# EAGLE board Module-WiFi-M0-v0.4-Board-1 (EAGLE 7.5.0)
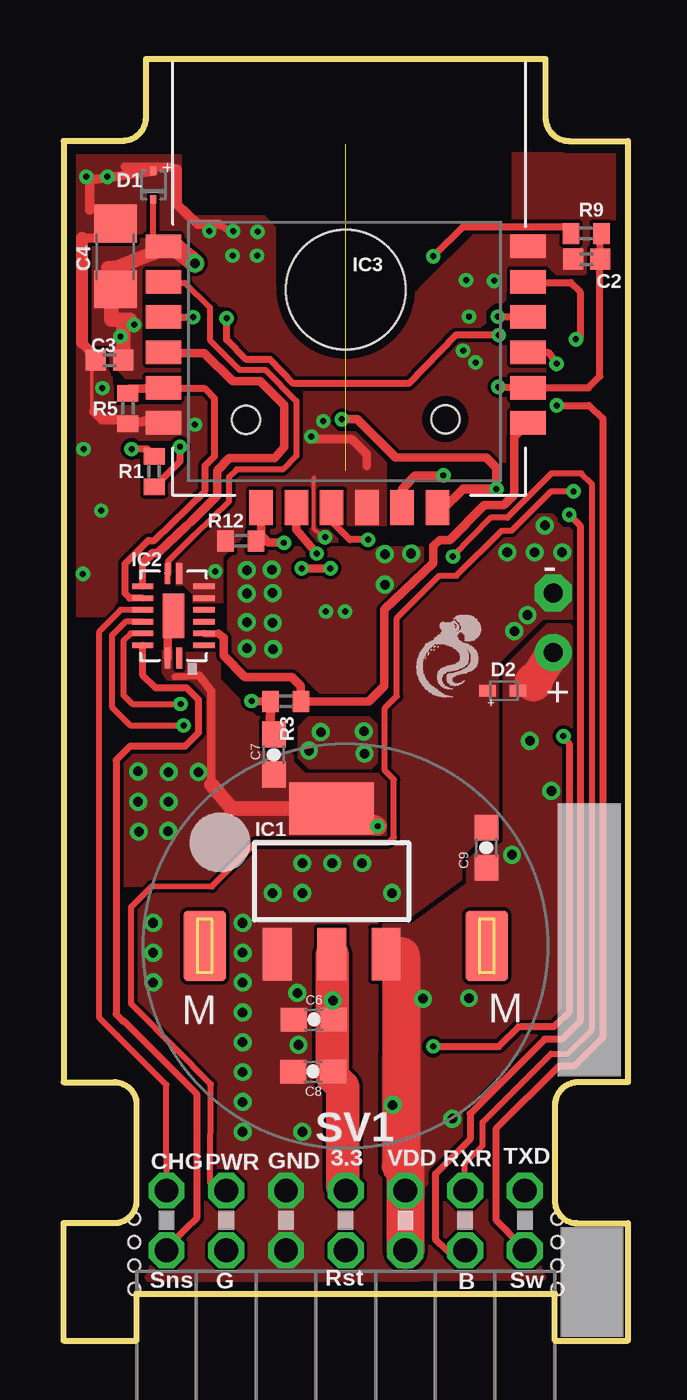
[diagram p0: board, top side]
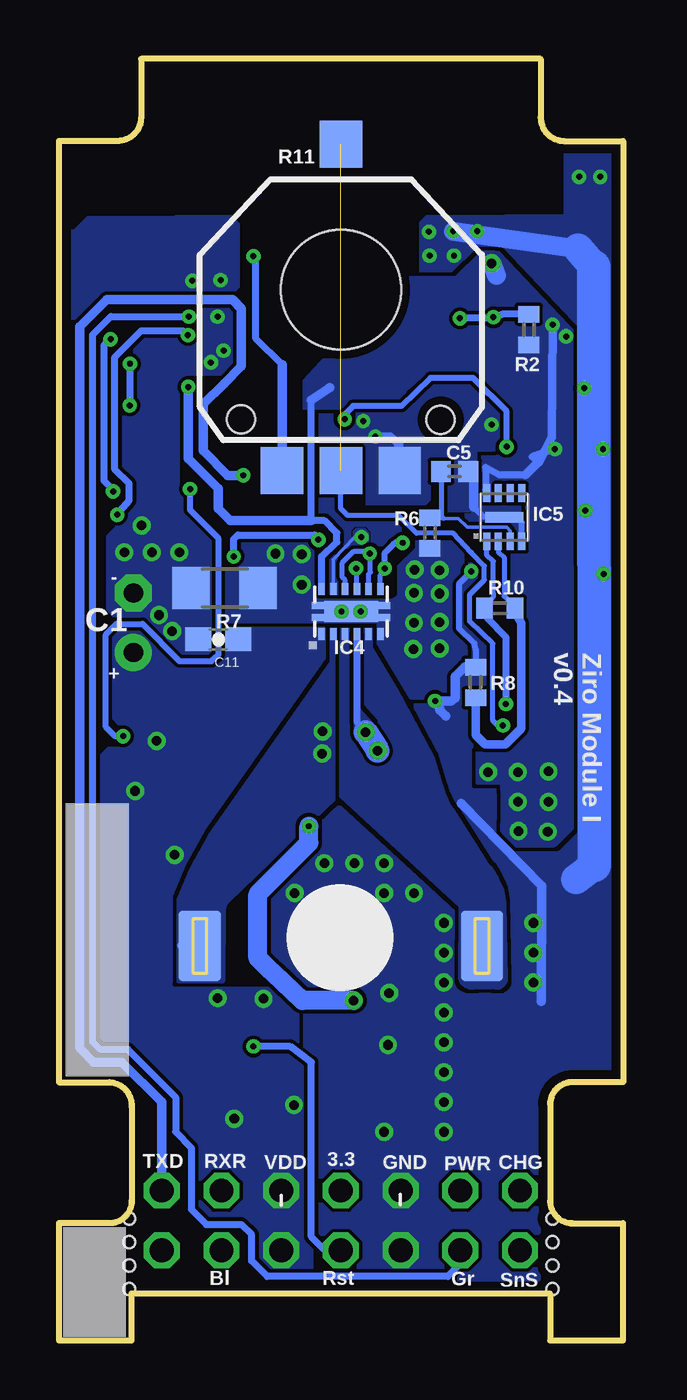
[diagram p1: board, bottom side, seen from below]

Size 24 x 54.55 mm. Coordinates in mm from the lower left corner, seen from the top.
Outline: 3.1,2 20.9,2 20.9,0 24,0 24,5 21.85,5 arc-90 20.9,5.96 20.9,9.97 arc-90 21.85,11 24,11 24,51.05 21.5,51.05 arc-90 20.5,52.05 20.5,54.55 3.5,54.55 3.5,52.05 arc-90 2.5,51.05 0,51.05 0,11 2.15,11 arc-90 3.1,10.07 3.1,5.96 arc-90 2.15,5 0,5 0,0 3.1,0 3.1,2
Copper layers (1*16): Top 0.0356mm / dielectric 1.5011mm / Bottom 0.0356mm
Design rules "oshpark-2layer-via-buried": minimum track width 6mil, minimum drill 10mil, track to track 6mil, track to pad 6mil, pad to pad 6mil, via to via 6mil, smd to smd 6mil, copper to edge 15mil, drill to drill 6mil, minimum pad ring 7mil, minimum via ring 7mil, stop-mask expansion 2.5mil, vias tented up to drill 16mil, thermal gap 10mil
Holes 0.5 mm at 3,5.2 3,2.2 3,4.2 3,3.2 21,5.2 21,4.2 21,3.2 21,2.2
tRestrict: area 5.5,31.2 to 6.8,31.3; 67 lines
bRestrict: area 22,34.3 to 22.1,35.5; area 13,32.3 to 13.1,33.6; area 8.8,35.4 to 11.7,35.5; area 6.7,33 to 6.7,33.5; 54 lines

## Footprints (pad centres in the part's own frame; a part is rotated, then mirrored left to right if it is on the bottom)
CAP-SLEEP = drill 0.813 pad 1.575: + 1.27,0 | drill 0.813 pad 1.575 octagon: - -1.27,0
0402-CAP = smd 0.85 x 0.9: 1 -0.58,0; 2 0.58,0
1206 = smd 1.6 x 1.8: 1 -1.4,0; 2 1.4,0
0603-CAP = smd 1.1 x 1: 1 -0.85,0; 2 0.85,0
SOD-923 = smd 0.36 x 0.25: A -0.6,0; C 0.6,0
SOD523 = smd 0.7 x 0.5: A 0.7,0; C -0.6,0
SOT223 = smd 1.219 x 2.235: 1 -2.311,-3.099; 2 0,-3.099; 3 2.311,-3.099 | smd 3.6 x 2.2: 4 0,3.099
DHVQFN16 = smd 0.24 x 0.9: 1 -0.25,1.8; 8 -0.25,-1.8; 9 0.25,-1.8; 16 0.25,1.8 | smd 0.9 x 0.24: 2 -1.3,1.25; 3 -1.3,0.75; 4 -1.3,0.25; 5 -1.3,-0.25; 6 -1.3,-0.75; 7 -1.3,-1.25; 10 1.3,-1.25; 11 1.3,-0.75; 12 1.3,-0.25; 13 1.3,0.25; 14 1.3,0.75; 15 1.3,1.25 | smd 0.9 x 1.9: EPAD 0,0
WT8266 = smd 1.5 x 1: 1 -7.9,1.35; 2 -7.9,-0.15; 3 -7.9,-1.65; 4 -7.9,-3.15; 5 -7.9,-4.65; 6 -7.9,-6.15; 13 7.6,-6.15; 14 7.6,-4.65; 15 7.6,-3.15; 16 7.6,-1.65; 17 7.6,-0.15; 18 7.6,1.35 | smd 1 x 1.5: 7 -3.75,-9.75; 8 -2.25,-9.75; 9 -0.75,-9.75; 10 0.75,-9.75; 11 2.25,-9.75; 12 3.75,-9.75
DSS12_P9X2 = smd 0.5 x 0.28: 1 -0.959,1.25; 2 -0.959,0.75; 3 -0.959,0.25; 4 -0.959,-0.25; 5 -0.959,-0.75; 6 -0.959,-1.25; 7 0.959,-1.25; 8 0.959,-0.75; 9 0.959,-0.25; 10 0.959,0.25; 11 0.959,0.75; 12 0.959,1.25 | smd 0.9 x 2.3: 13 0,0 | smd 0.305 x 0.61: 13@1 -0.25,1.36; 13@2 0.25,1.36; 13@3 -0.25,-1.36; 13@4 0.25,-1.37 | drill 0.254 pad 0.508: G1 0,0.406; G2 0,-0.406
DFN-8 = smd 0.3 x 0.75: 1 -0.75,-1.025; 2 -0.25,-1.025; 3 0.25,-1.025; 4 0.75,-1.025; 5 0.75,1.025; 6 0.25,1.025; 7 -0.25,1.025; 8 -0.75,1.025 | smd 1.6 x 0.45: PAD 0,0
MOTOR-NO_HOLE = smd 1.8 x 3: M1@1 6,0; M2@1 -6,0 | smd 1.8 x 3 bottom: M1@2 6,0; M2@2 -6,0 | smd 0.305 x 0.152: M1@3 6,1.3; M2@3 -6,1.3
R0402 = smd 0.7 x 0.9: 1 -0.65,0; 2 0.65,0
R1206 = smd 1.6 x 1.803: 1 -1.422,0; 2 1.422,0
ANGLE_SENSOR_MURATA = smd 1.8 x 2: 1 -2.5,-7.7; 2@1 0,-7.7; 2@2 0,6.2; 3 2.5,-7.7 | hole 5.1: 0,0 | hole 1.2: -4.24,-5.51; 4.24,-5.53
FE07-2W = drill 1.016 octagon: 1 -7.62,1.27; 2 -7.62,-1.27; 3 -5.08,1.27; 4 -5.08,-1.27; 5 -2.54,1.27; 6 -2.54,-1.27; 7 0,1.27; 8 0,-1.27; 9 2.54,1.27; 10 2.54,-1.27; 11 5.08,1.27; 12 5.08,-1.27; 13 7.62,1.27; 14 7.62,-1.27

## Placement (x,y rotation side)
C1  47uF,25V  [CAP-SLEEP]  20.82,30.55 270 bottom
C2  0.1uF  [0402-CAP]  22.25,46.02 180 top
C3  0.1uF  [0402-CAP]  1.96,41.72 180 top
C4  100u  [1206]  2.2,46.13 90 top
C5  0.1uF  [0402-CAP]  7.16,36.99 0 bottom
C6  1u  [0603-CAP]  10.64,13.67 180 top
C7  1u  [0603-CAP]  8.95,24.94 90 top
C8  1u  [0603-CAP]  10.62,11.46 180 top
C9  1u  [0603-CAP]  17.98,20.98 90 top
C11  1u  [0603-CAP]  17.21,29.84 180 bottom
D1  ESD9X5.0ST5G  [SOD-923]  3.82,49.16 270 top
D2  PMEG3005EB  [SOD523]  18.74,27.66 180 top
IC1  LM1117_3.3VSOT223  [SOT223]  11.4,19.55 0 top
IC2  74HC4051_DHVQFN16  [DHVQFN16]  4.67,30.85 180 top
IC3  WT8266  [WT8266]  12.15,45.21 0 top
IC4  DRV8835DSSR  [DSS12_P9X2]  11.57,31.03 90 bottom
IC5  LM358-DFN  [DFN-8]  5.05,35.04 0 bottom
M1  Round Motor  [MOTOR-NO_HOLE]  12,16.8 0 top
R1  30k  [R0402]  3.85,36.99 90 top
R2  3k  [R0402]  4.01,43.02 270 bottom
R3  30k  [R0402]  9.46,27.21 180 top
R5  3k  [R0402]  2.73,39.67 90 top
R6  30k  [R0402]  8.21,34.37 270 bottom
R7  0.02E, 1W  [R1206]  16.95,32.03 180 bottom
R8  3k  [R0402]  6.27,28.01 270 bottom
R9  30k  [R0402]  22.23,47.11 180 top
R10  30k  [R0402]  5.24,31.17 0 bottom
R11  10k  [ANGLE_SENSOR_MURATA]  12,44.72 0 bottom
R12  3k  [R0402]  7.54,34.03 0 top
SV1  [FE07-2W]  12,5.12 0 top

## Library data of the parts
C1 D1 IC2 IC3 M1 R11 = 1_ZeroUI
C2 C3 C5 = 1_ZeroUI; PROD_ID: CAP-12416
C4 C6-C9 C11 = SparkFun-Passives
D2 = diode
IC1 = 1_ZeroUI; PROD_ID: VREG-08170
IC4 = 1_ZeroUI; MANUFACTURER_PART_NUMBER: drv8835_dss_12; VENDOR: Texas Instruments
IC5 = 1_ZeroUI; VARIANT: DFN
R1-R3 R5-R10 R12 = rcl
SV1 = con-lsta; OC_FARNELL: unknown; OC_NEWARK: unknown

## Nets
3.3V: C2.1 C3.1 C4.1 C6.1 C7.1 C8.1 D1.C IC1.2 IC1.4 IC2.16 IC2.EPAD IC3.1 IC3.14 IC4.12 IC5.8 R1.2 R2.2 R9.1 SV1.7
/RST: IC3.12 R1.1 SV1.8
CHG_ON: IC2.12 SV1.1
GND: C1.- C2.2 C3.2 C4.2 C5.2 C6.2 C7.2 C8.2 C9.2 C11.2 D1.A D2.A IC1.1 IC2.6 IC2.7 IC2.8 IC3.6 IC3.10 IC3.18 IC4.11 IC5.4 IC5.PAD R3.2 R5.1 R7.2 R8.1 R11.3 R12.1 SV1.5 SV1.6
LED-G: IC3.16 SV1.4
MOT-1: IC4.2 IC4.4 M1.M1@1 M1.M1@2 M1.M1@3
MOT-2: IC4.3 IC4.5 M1.M2@1 M1.M2@2 M1.M2@3
MOT_IN1: IC3.8 IC4.8 IC4.10
MOT_IN2: IC3.7 IC4.7 IC4.9 R12.2
MOT_IRAW: IC4.6 IC4.13 IC4.13@1 IC4.13@2 IC4.13@3 IC4.13@4 IC4.G1 IC4.G2 R6.2 R7.1
MOT_ISNS: IC2.14 IC5.1 R10.1
MOT_POS: IC2.13 R11.2@1 R11.2@2
MUX_COM: IC2.3 IC3.13 R3.1
MUX_S0: IC2.11 IC3.5 R5.2
MUX_S1: IC2.10 IC3.4
MUX_S2: IC2.9 IC3.2
N$10: C5.1 IC5.3 R6.1
N$17: R9.2 R11.1
N$18: IC5.2 R8.2 R10.2
PROGL/LED-B: IC3.3 R2.1 SV1.12
PWR_EN: IC3.17 SV1.3
RXD/LED-R: IC3.9 SV1.11
SW_INT: IC3.15 SV1.14
TXD: IC3.11 SV1.13
VBATT_SENSE: IC2.15 SV1.2
VDD: C1.+ C9.1 C11.1 D2.C IC1.3 IC4.1 SV1.9 SV1.10

## Tracks (layer width: path | path; a pad name or v marks a point on that pad's centre or on a via)
3.3V  (via drill 0.25, 0.41)
  Top 0.152: C8.1 11.47,12.44 arc-45 11.87,6.58
  Top 0.203: 3.94,46.42 3.81,46.6
  Top 0.254: 3.94,46.42 3.81,46.84 D1.C
  Top 0.305: 1.91,44.79 1.91,45.64 | 3.73,37.53 3.83,37.53 3.91,37.61 3.58,37.94 v2.9,37.94 | 4.75,28.26 5.77,28.31 | 11.43,16.42 IC1.2 | v18.49,40.58 19.41,40.58 19.45,40.51 IC3.14 22.32,40.56 22.81,41.05 22.81,45.88 22.8,45.94 C2.1 22.8,47.17 22.71,47.21 R9.1
  Top 0.356: C4.1 1.91,44.79 | 3.8,46.28 3.81,46.6 | R1.2 3.73,37.53 | IC2.16 4.42,30.6 IC2.EPAD | 5.77,28.31 6.27,27.65 6.27,23.67 | C6.1 11.47,13.26 11.43,13.31
  Top 0.406: C4.1 2.03,45.17 | 2.82,43.45 v3,43.23
  Top 0.61: 1.91,45.64 2.32,45.69 3.8,46.28 IC3.1 | 2.03,45.17 2.03,43.45 2.82,43.45 | v3,43.23 2.54,43.45 C3.1 | 6.27,23.67 7.16,22.65 IC1.4
  Top 0.813: IC3.1 4.73,46.56 v5.59,45.85 | IC1.2 11.46,15.72 v11.46,14.48 | v13.36,21.89 IC1.4
  Top 1.422: SV1.7 11.87,6.58 11.87,10.81 11.43,11.25 11.43,13.31 11.43,16.42
  Bottom 0.305: IC4.12 12.82,33.37 12.17,33.98 12.17,34.37 12.69,34.89 13.26,34.89 13.26,40.02 | 2.97,43.23 v3,43.23 | v2.9,37.94 3.86,37.61 3.58,37.33 3.58,37.36 | 4.15,36.84 5.27,36.84 5.84,37.15 5.84,36.21 IC5.8
  Bottom 0.356: v3,43.23 3,43.2 3.02,38.42 3.58,37.36 3.63,37.36 4.15,36.84
  Bottom 0.406: 13.26,34.89 16.7,34.89 17.22,35.42 17.22,36.27 18.49,37.53 v18.49,40.58 | 13.26,40.02 12.47,40.56
  Bottom 0.813: v5.59,45.85 5.41,45.36 5.38,45.34 | v11.46,14.48 13.64,14.48 14.85,15.63 15.08,15.83 15.53,16.29 15.53,19.01 13.36,21.18 v13.36,21.89
  other vias: 3.2,21.66 4.47,24.2 4.47,22.93 4.45,21.69 5.74,24.2 2.42,42.73 3.17,22.93 3.17,24.23
  pour Top (no thermals): 13.79,21.48 13.82,21.66 13.82,24.1 10.26,24.1 9.73,24.63 9.73,26.48 8.18,26.54 6.63,28.14 6.63,28.77 6.63,29.31 6.68,29.36 0.1,29.31 0.13,24.33 -0.05,24.58 -0.1,19.37 4.65,19.35 6.14,19.55 8.03,21.43
  pour Bottom (rank 2, no thermals): 13.56,45.21 7.06,45.21 5.98,46.3 5.34,46.3 -0.19,40.42 -0.31,24.36 2.95,21.08 4.65,21.08 5.11,21.7 arc-5 5.11,23.75 6.16,23.75 6.15,24.94 6.15,27.65 6.6,28.17 6.02,28.16 6.05,37.59 4.75,37.61 4.72,39.72 13.61,39.69
  pour Top (no thermals): 4.78,46.81 1.14,46.78 1.14,42.6 2.68,41.04 4.88,41.01 4.85,46.58
/RST  (via drill 0.25)
  Top 0.305: v15.72,12.52 18.52,12.52 19.36,13.36 20.86,13.36 21.5,14 21.5,25.41 21.3,25.6 v21.26,25.72 | 16.09,35.21 IC3.12 | v4.95,38.04 4.95,37.41 3.91,36.37 3.85,36.37 R1.1
  Top 0.356: v11.84,39.21 12.5,39.21 14.12,37.59 16.31,37.59 17.98,37.59 18.41,37.15 v18.41,36.24
  Top 0.406: 16.09,35.21 16.09,35.34 16.99,36.24 v18.41,36.24
  Bottom 0.254: 21.35,25.72 21.6,25.72 22,26.12 22,30.05 21.55,30.5 20.43,30.5 18.87,28.91 17.51,28.91 17.2,29.2 17.2,34.13 18.41,35.35 v18.41,36.24 | v4.95,38.04 4.95,39.55 6.37,40.97 8.19,40.97 9.42,39.77 11.48,39.77 11.84,39.41 v11.84,39.21
  Bottom 0.305: SV1.8 12.5,3.83 12.66,3.83 13.26,4.43 13.26,11.85 14.16,12.52 v15.72,12.52 | v21.26,25.72 21.35,25.72
CHG_ON
  Top 0.254: IC2.12 2.43,31.1 1.52,30.17 1.52,13.73 2.29,12.97 4.37,10.9 4.37,7.85 4.38,7.73 SV1.1
GND  (via drill 0.25, 0.41)
  Top 0.152: 1.28,39.53 1.19,39.62 1.19,41.8 C3.2 | v11.12,34.19 10.64,34.52 | 10.64,36.73 10.67,36.75
  Top 0.178: 10.64,34.52 10.64,36.73
  Top 0.305: v7.21,47.21 7.09,47.19 6.6,47.52
  Top 0.356: R5.1 2.53,39.19 | v10.54,38.48 10.44,38.55 10.62,38.37 12.27,38.37 12.9,37.74 12.9,37.23 | 4.84,49.85 4.57,49.96 2.6,49.96 D1.A | R3.2 v8,27.22
  Top 0.406: 1.77,46.94 0.79,46.92 | C3.2 1.21,42 0.79,42.48 | 4.04,39.22 R5.1 | 2.53,39.19 1.63,39.19 1.28,39.53 | 1.11,48.11 1.11,49.53 1.09,49.38 D1.A | 6.6,47.52 5.71,47.52 4.84,48.34 4.84,49.85 | C7.2 8.8,26.09 R3.2
  Top 0.508: 0.79,42.48 0.79,46.92
  Bottom 0.152: v11.12,34.19 11.41,34.19 12.32,33.25 IC4.11
  Bottom 0.254: v6.45,32.73 6.99,32.19 6.99,30.34 | IC5.4 4.3,34.8 4.55,35.05 | IC5.PAD 5.94,35.07 6.35,35.48 | R8.1 6.27,29.43 6.33,29.69 6.99,30.32
  Bottom 0.356: v10.54,38.48 9.89,38.47 9.53,38.18 | 4.55,35.05 4.74,35.07 IC5.PAD
  Bottom 0.406: R11.3 9.53,38.18 | 7.54,26.59 7.8,26.85 arc-45 v8,27.22 7.3,27.22 7.14,27.35 7.14,28.27 6.74,28.68 6.22,28.68 R8.1 | 6.88,22.86 3.45,19.35 3.48,14.45 | 6.35,35.48 6.35,36.88 C5.2
  Bottom 0.813: v7.21,47.21 1.91,46.48
  Bottom 1.27: 1.91,46.48 1.25,45.71 | 1.22,20.23 1.99,19.64
  Bottom 1.422: 1.25,45.71 1.22,20.23
  other vias: 7.62,17.78 11.43,20.32 7.62,13.97 7.62,12.7 7.62,15.24 7.62,16.51 17.12,45.13 18.31,45.1 16.99,42.13 8.26,47.19 8.23,46.17 7.19,46.17 5.59,38.98 12.7,20.32 20.47,34.69 21.21,33.55 0.85,37.94 0.97,49.52 0.83,32.63 6.2,47.21 7.62,10.16 7.62,11.43 10.16,20.32 18.87,33.55 17.25,43.58 1.65,40.53 20.04,33.55 19.74,30.88 1.6,35.33 11.05,39.14 17.53,41.62 19.18,30.19 7.62,8.89 3.81,17.78 3.81,16.51 3.81,15.24 9.94,14.8 10.16,8.89 10,12.59 8.89,19.05 1.87,49.52 10.16,19.05 13.97,19.05
  pour Bottom (rank 6, no thermals): 0,0 24.13,0 24.13,57.22 0,57.22
  pour Top (rank 6, no thermals): 2.26,2.54 11.15,2.54 11.25,2.56 23,2.68 23,31.64 14.05,31.18 14.02,21.46 2.41,21.46
  pour Top (rank 2, no thermals): 24.56,38.12 14.17,38.12 14.17,28.09 24.56,28.09
  pour Top (isolate 0.025, rank 2, no thermals): -5.08,57.22 30.48,57.22 30.53,33.95 15.32,33.83 7.47,33.83 6.86,33.22 6.83,33.22 6.83,30.14 -5.03,30.14
LED-G  (via drill 0.25)
  Top 0.305: v18.47,43.58 19.75,43.58 IC3.16
  Bottom 0.305: v18.47,43.58 21.78,43.58 22.55,42.81 22.55,12.72 22.23,12.4 21.06,12.4 19.02,10.37 19.02,8.89 18.36,8.2 18.36,5.59 17.73,4.95 16.23,4.95 15.8,4.52 15.8,3.4 15.14,2.74 7.44,2.74 6.92,3.26 SV1.4
MOT-1  (via drill 0.41)
  Top 0.305: M1.M1@2 18.25,17.05 18.27,17.06 18.57,17.44 18.57,17.69 18.52,17.76
  Bottom 0.305: IC4.4 11.32,26.33 v10.95,25.9
  Bottom 0.356: M1.M1@2 18.8,16.83
  Bottom 1.016: v10.95,25.9 v10.44,25.11
  other vias: 12.8,24.99 12.78,25.93
  pour Bottom (rank 3, no thermals): 12.19,30.37 12.19,23.11 16.78,18.7 arc-52 16.96,18.34 16.99,15.39 arc90 17.22,15.15 18.85,15.18 arc89 19.01,15.5 19,18.41 arc17 19,18.73 18.82,19.31 arc20 18.46,20.31 16.14,23.97 12.58,29 12.5,29.3 12.5,30.37
  pour Top (rank 4, no thermals): 10.03,24.6 10.03,26.1 10.41,26.49 13.01,26.51 13.41,26.11 13.41,24.72 12.89,24.2 10.43,24.2
  pour Bottom: 11.23,26.87 10.64,26.23 11.25,25.88 arc120 11.39,25.96 11.39,26.92 11.25,26.9 arc81
MOT-2
  Bottom 0.254: 5.68,16.77 M1.M2@2
  pour Bottom (rank 2, no thermals): 6.93,18.49 6.95,15.41 arc-89 6.25,15.03 5.43,15.01 arc-91 4.97,15.34 5.02,18.62 5.11,19.15 arc-19 5.83,20.35 7.27,22.6 arc18 7.74,23.69 7.73,23.64 8.02,24.63 arc-12 8.14,24.91 10.57,29.41 10.57,30.32 11.05,30.32 12,30.34 12,23.16
MOT_IN1  (via drill 0.25)
  Top 0.356: v10.77,33.5 9.9,34.52 IC3.8
  Bottom 0.203: IC4.10 11.82,32.36 11.94,32.48 11.94,33.11 11.45,33.6 10.82,33.6 10.74,33.4 | 10.74,33.4 v10.77,33.5 | IC4.8 10.82,32.41 10.82,32.6 10.74,32.71 10.74,33.4
MOT_IN2  (via drill 0.25)
  Top 0.356: v11.35,32.86 v10.13,32.86 | v9.37,33.95 8.71,33.95 8.4,34.27 IC3.7
  Top 0.406: R12.2 8.4,34.03 8.4,34.27
  Bottom 0.203: IC4.7 10.32,32.58 10.13,32.81 | IC4.9 11.32,32.75 v11.35,32.86
  Bottom 0.254: 10.13,32.81 v10.13,32.86 10.14,33.52 9.75,33.9 9.63,34 arc-37 v9.37,33.95
MOT_IRAW  (via drill 0.41)
  other vias: 13.67,32.18 8.86,32.81 8.92,29.43 8.89,31.82 7.8,32.79 7.8,31.79 7.8,30.58 8.89,30.55 7.8,29.46 13.67,33.47 14.78,33.5
  pour Bottom (no thermals): 17.17,33.98 6.73,34 6.81,33.12 6.65,28.54 7.45,28.54 7.49,28.33 7.49,27.34 9,27.36 10.41,29.69 10.41,30.6 17.2,30.6
  pour Top (no thermals): 15.27,33.73 7.49,33.73 7.04,33.17 7.04,29.1 9.32,26.82 13.72,26.79 13.59,31.16 15.23,32.56
MOT_ISNS  (via drill 0.25)
  Top 0.254: IC2.14 2.85,30.1 2.54,29.79 2.54,27.48 2.92,27.1 v4.98,27.1
  Bottom 0.203: R10.1 5.51,31.67 5.51,32 5.51,33.16 5.79,33.4 IC5.1
  Bottom 0.305: R10.1 5.79,31.08 5.79,30.78 4.98,29.94 v4.98,27.1
MOT_POS  (via drill 0.25)  (1 unrouted)
  Top 0.254: IC2.13 2.64,30.6 2.06,30.02 2.06,26.97 2.85,26.18 v5.11,26.18
  Bottom 0.203: v5.11,26.18 5.3,26.16 5.54,26.39 5.54,29.66 6.53,30.61 6.53,31.75 5.89,32.37 5.89,32.97 6.44,33.52 6.45,33.55 7.21,34.36 8.79,34.36 9.55,35.12 11.72,35.12 12.01,35.42 12.01,37.01
  Bottom 0.305: R11.2@1
  Bottom 0.356: 12.01,37.01 R11.2@1
MUX_COM
  Top 0.305: IC2.3 6.57,30.1
  Top 0.356: 6.57,30.1 6.81,29.91 6.81,29.15 7.72,28.24 9.71,28.24 10.08,27.86 10.08,27.23 R3.1 | IC3.13 20.24,38.79 19.96,39.29 19.18,38.48 19.18,36 18.73,35.55 17.89,35.55 16.42,34.08 16,34.08 15.72,33.81 15.72,33.09 13.64,31.11 13.64,27.86 12.98,27.21 R3.1 | R3.1 10.01,27.31
MUX_S0
  Top 0.305: IC2.11 2.81,31.6 2.62,31.8 2.62,33.06 3.61,34.05 3.85,34.05 arc45 3.87,34.06 6.02,36.16 6.02,37.23 6.43,37.64 6.43,40.1 6.02,40.51 4.25,40.51
  Top 0.356: R5.2 2.8,40.5 2.8,40.52 4.24,40.52 IC3.5 4.25,40.51
MUX_S1
  Top 0.305: IC2.10 3.37,33.11
  Top 0.356: 3.37,33.11 3.79,33.52 4.01,33.52 5.24,34.69 5.38,34.82 6.53,35.97 6.53,36.27 6.53,37.03 7.06,37.56 8.99,37.56 9.39,38.03 9.39,39.82 8.37,40.84 7.19,40.84 5.99,42.03 4.28,42.03 IC3.4
MUX_S2
  Top 0.254: IC3.2 5.16,45.01 6.22,43.97 6.22,42.58 7.48,41.32 8.58,41.32 9.91,39.99 9.91,37.65 9.34,37.08 7.36,37.08 7.04,36.75 7.04,35.71 5.56,34.28 4.45,33.17 4.45,32.67
  Top 0.305: 4.45,32.67 IC2.9
N$10
  Bottom 0.152: IC5.3 4.8,34.45 4.94,34.61 6.62,34.61 7.01,34.99 7.63,34.99
  Bottom 0.203: R6.1 7.63,34.99 7.74,35.07 C5.1
N$17  (via drill 0.25)
  Top 0.305: v15.72,46.15 16.99,47.42 21.3,47.42 R9.2
  Bottom 0.305: 15.64,46.11 15.64,42.67 14.5,41.53
  Bottom 0.406: 14.5,41.53 R11.1 | v15.72,46.15 15.64,46.11
N$18
  Bottom 0.203: IC5.2 5.3,33.54 5.05,33.34 5.05,31.69 R10.2
  Bottom 0.356: R8.2 6.27,25.78 5.86,25.37 5,25.37 4.32,26.05 4.32,30.55 4.65,31.08 4.6,31.29 R10.2
PROGL/LED-B  (via drill 0.25)
  Top 0.203: v6.93,43.5 6.96,43.53
  Top 0.254: 4.15,43.73 IC3.3
  Top 0.305: SV1.12 16.32,3.82 15.82,4.3 15.82,7.11 17.3,8.58 17.3,9.65 20.47,12.82 21.2,12.82 21.97,13.59 21.97,34.69 v21.51,35.15 | v18.51,42.79 16.69,42.79 14.68,40.73 9.78,40.73 8.79,41.75 7.78,41.75 6.93,42.59 v6.93,43.5 | IC3.3 v5.51,43.55
  Bottom 0.305: v21.51,35.15 21.01,35.76 21.01,36.47 21.61,37.06 21.61,41.86 20.5,42.98 18.72,42.98 v18.51,42.79 | v5.51,43.55 5.59,43.5 | 5.59,43.5 v6.93,43.5 | R2.1 5.14,43.67 5.38,43.54 5.59,43.5
PWR_EN  (via drill 0.25)
  Top 0.203: 8,21.02 8.03,21.06
  Top 0.254: SV1.3 6.89,6.19 6.25,6.71 6.27,10.92 3.11,14.1 2.87,14.34 2.87,18.45 3.77,19.35 6.31,19.32 8,21.02 | v21.69,36.14 20.73,36.14 19.05,34.46 18.62,34.46 16.71,32.56 15.98,32.56 14.17,30.75 14.17,27.43 13.66,26.92 13.66,24.26 14.05,23.88 14.05,21.43 13.83,21.21 8.18,21.21 8.03,21.06
  Top 0.305: v21.79,42.62 arc99 21.97,42.69 21.97,44.64 21.58,45.03 19.92,45.03 19.75,45
  Top 0.356: 19.75,45 IC3.17
  Bottom 0.305: v21.69,36.14 21.65,36.16 22.07,36.59 22.07,42.34 21.9,42.59 v21.79,42.62
RXD/LED-R  (via drill 0.25)
  Top 0.254: SV1.11 17.07,7.54 17.83,8.3 17.83,9.3 20.74,12.21 21.46,12.21 22.48,13.24 22.48,36.44 22.02,36.9 20.75,36.9 19.71,35.85 18.88,35.02 18.16,35.02 v16.56,33.37
  Top 0.305: v12.95,34.08 12.18,34.08 11.4,34.86 11.4,35.27 IC3.9
  Bottom 0.305: v16.56,33.37 16.56,34.11 16.38,34.29 13.12,34.29 12.95,33.95 v12.95,34.08 12.95,34
SW_INT  (via drill 0.25)
  Top 0.305: IC3.15 20.62,42.06 v20.97,41.57 | v20.98,39.8 22.36,39.8 22.94,39.24 22.94,12.91 21.71,11.68 21.06,11.68 18.39,9.01 18.39,5.16 18.82,4.73 SV1.14
  Bottom 0.305: v20.97,41.57 20.97,39.98 v20.98,39.8
TXD  (via drill 0.25)
  Top 0.356: IC3.11 14.4,36.24 14.96,36.82 v16.15,36.82
  Top 0.406: IC3.11 14.4,34.92
  Bottom 0.305: 17.86,38.42 17.86,38.45
  Bottom 0.406: SV1.13 19.62,10.16 21.32,11.85 22.51,11.85 23.11,12.45 23.11,43.15 21.97,44.29 16.59,44.29 16.23,43.93 16.23,41.47 16.97,40.73 17.85,39.85 17.86,39.84 17.86,38.45 | v16.15,36.82 16.81,36.82 17.86,37.87 17.86,38.42
VBATT_SENSE
  Top 0.305: IC2.15 3.38,28.32 3.91,27.78 5.23,27.78 5.74,27.27 5.74,25.88 5.16,25.29 2.82,25.29 2.23,24.71 2.23,13.89 2.52,13.61 2.56,13.61 5.66,10.51 5.66,5.21 5.18,4.75 4.38,3.97 SV1.2
VDD  (via drill 0.41)
  Top 0.229: D2.C 19.8,27.77 19.99,28.02
  Top 0.406: 20.3,28.78 C1.+ | 14.36,16.36 IC1.3
  Top 1.422: 20.02,28.04 20.8,29.23
  Top 1.626: SV1.10 SV1.9 14.53,7.39 14.36,7.44 14.36,16.36 | 19.99,28.02 20.02,28.04
  other vias: 19.84,25.53 20.75,23.39 19.08,20.68 17.25,14.58 16.54,9.45 15.29,14.55 14,10.03
  pour Bottom (rank 2, no thermals): 13.23,2.54 13.31,10.85 13.38,11.58 13.26,11.83 13.84,12.32 13.84,14.99 19.13,14.99 arc90 19.21,15.3 19.21,18.94 18.66,20.27 17.82,21.75 12.7,29.05 12.7,30.3 16.74,30.3 17.63,28.93 19.13,28.93 20.58,30.48 22.81,30.52 22.83,30.5 22.83,10.41 22.91,10.34 22.91,3.96 22.89,2.54
  pour Top (no thermals): 13.61,17.7 14.81,17.7 17.2,19.43 17.2,20.4 17.91,21.11 18.75,21.11 18.75,28.65 18.77,28.65 20.57,30.45 21.54,30.45 21.64,30.35 21.64,13.79 20.93,13.08 20.93,12.17 15.32,6.55 14.12,6.73 13.59,7.26 13.61,16.99

## Text on the board
tPlace: M | M
tNames: - | + | TXD | CHG | PWR | GND | 3.3 | VDD | RXR | Sns | G | Rst | B | Sw
bNames: - | Ziro Module I / v0.4 | + | CHG | PWR | GND | 3.3 | VDD | RXR | TXD | SnS | Gr | Rst | Bl
Reference: Capacitor | Module PCB I / TOP
tDocu: CHG_ON PWR_EN GND 3.3V Vdd Rx/Lr TxD / Vbat LG GND DTR Vdd ProgL SWINT